# EAGLE board Qwiic Solid State Relay-Panel (EAGLE 9.6.0)
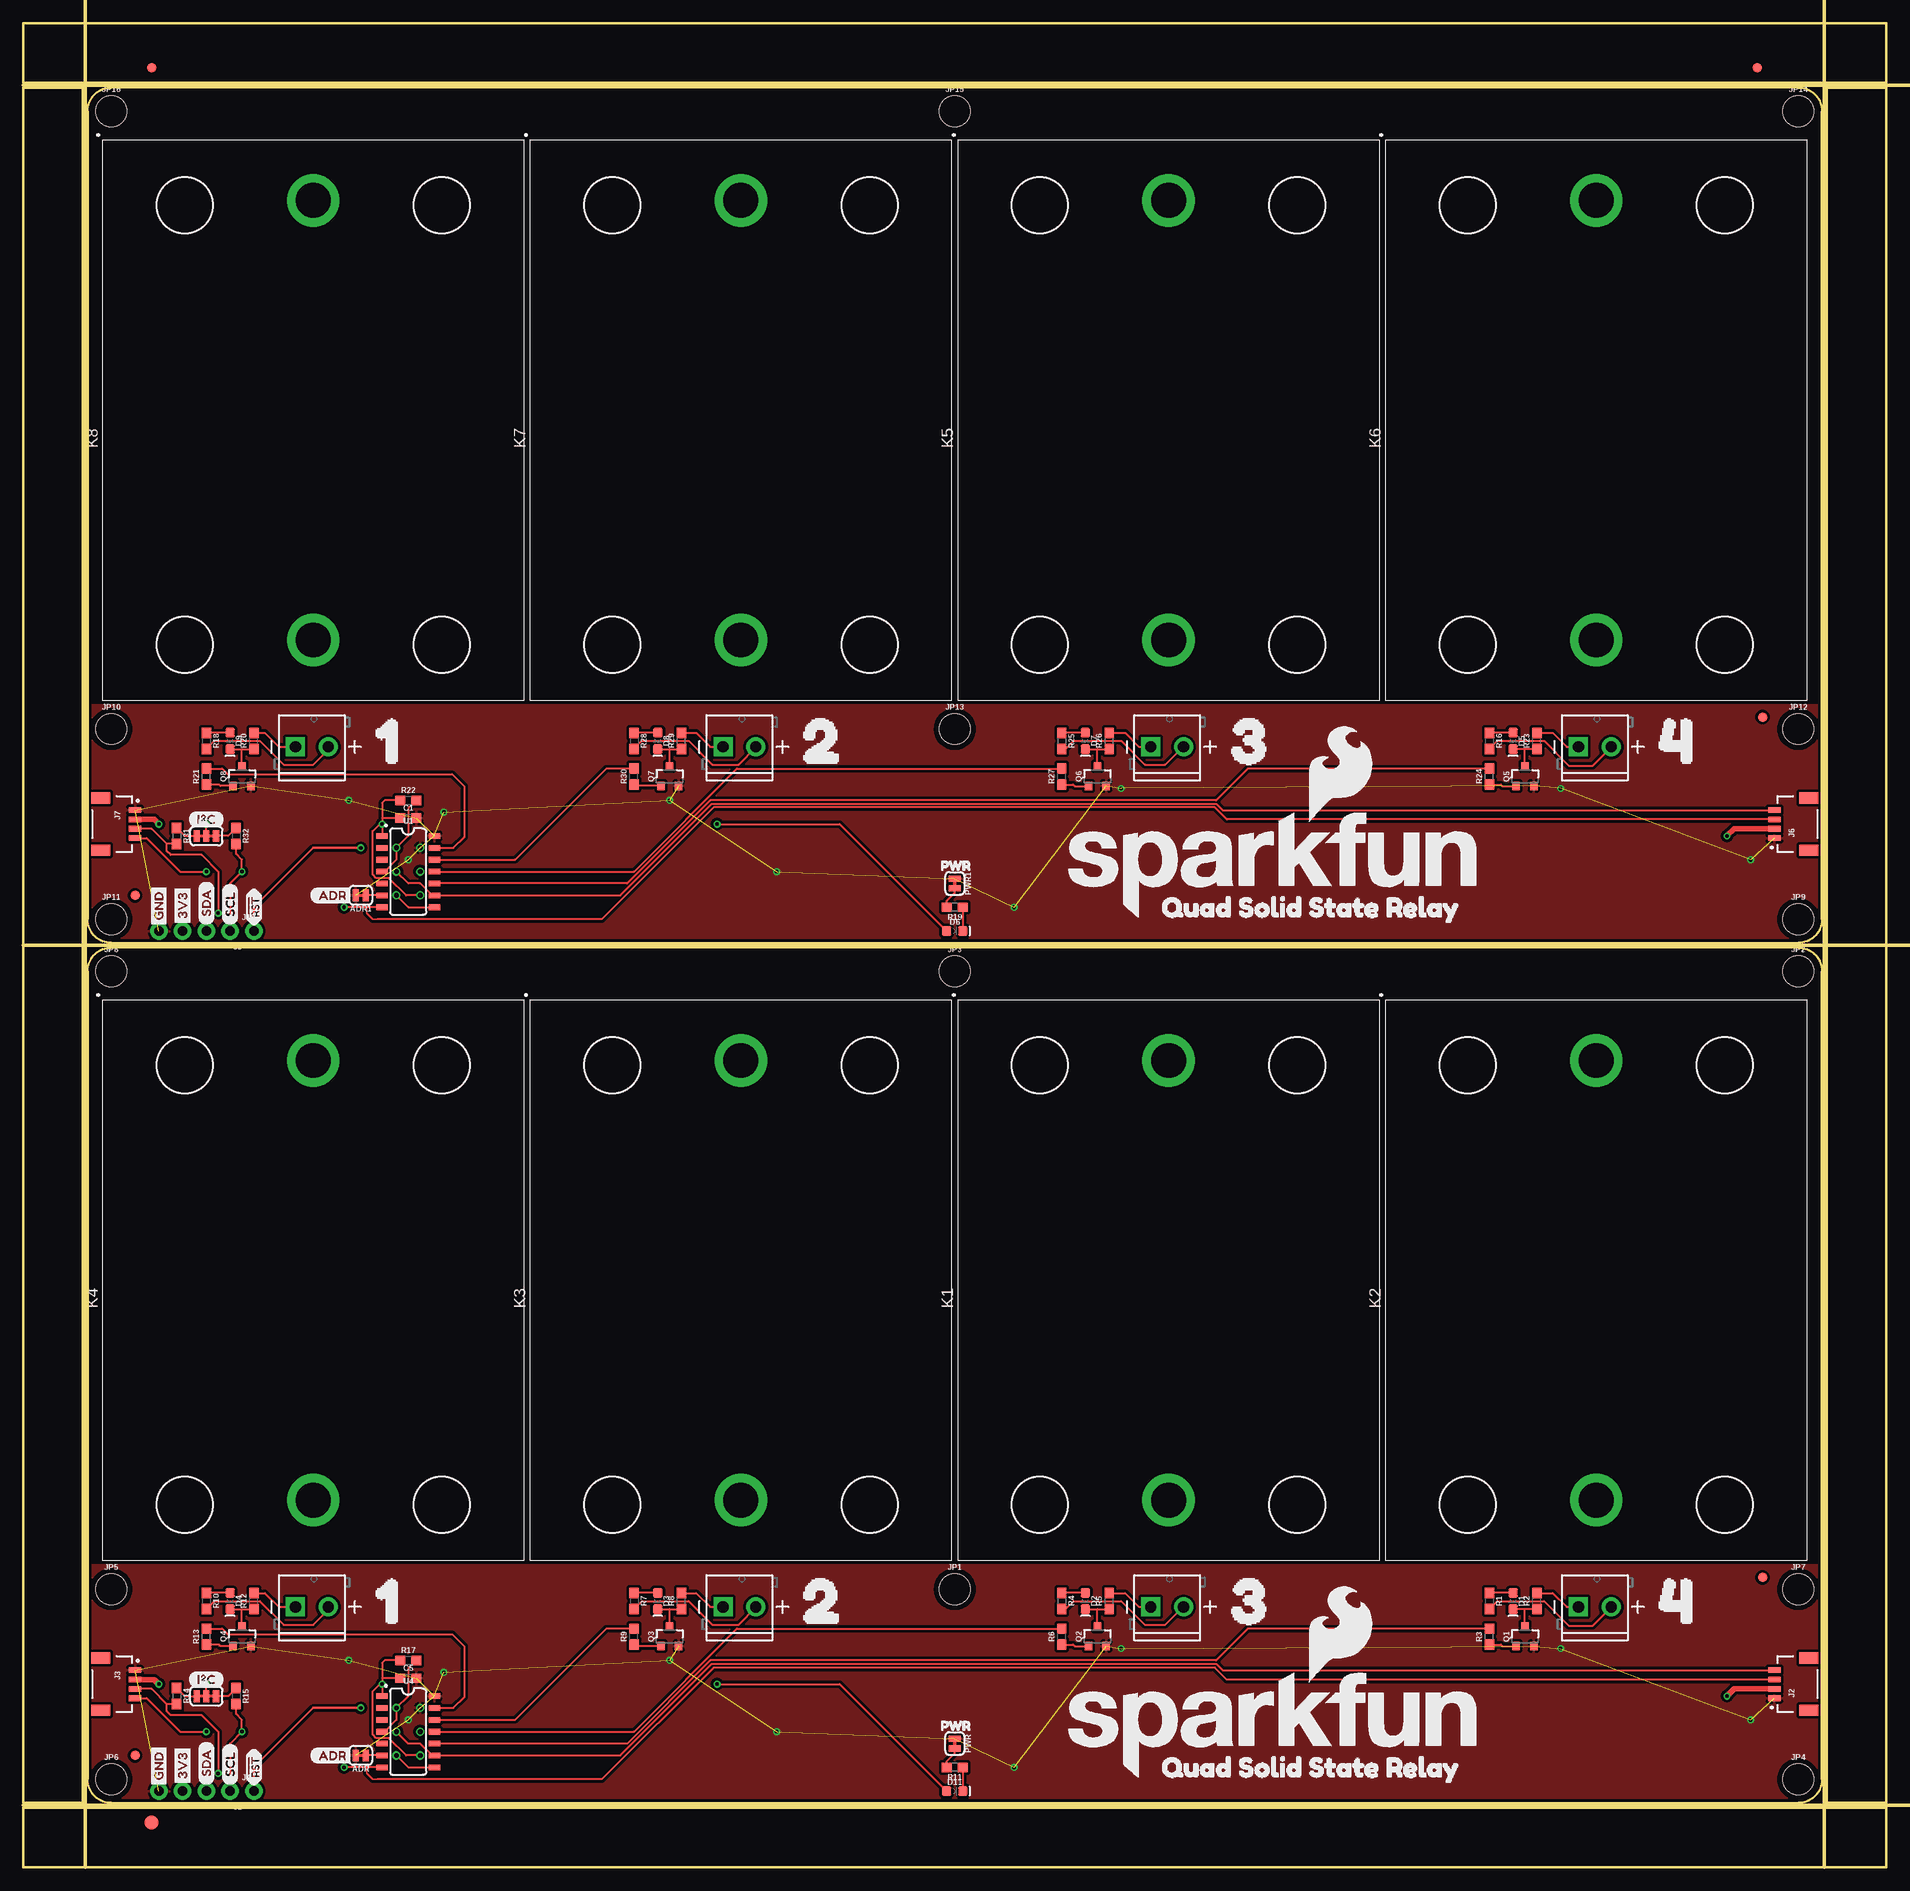
[diagram p0: board, top side]
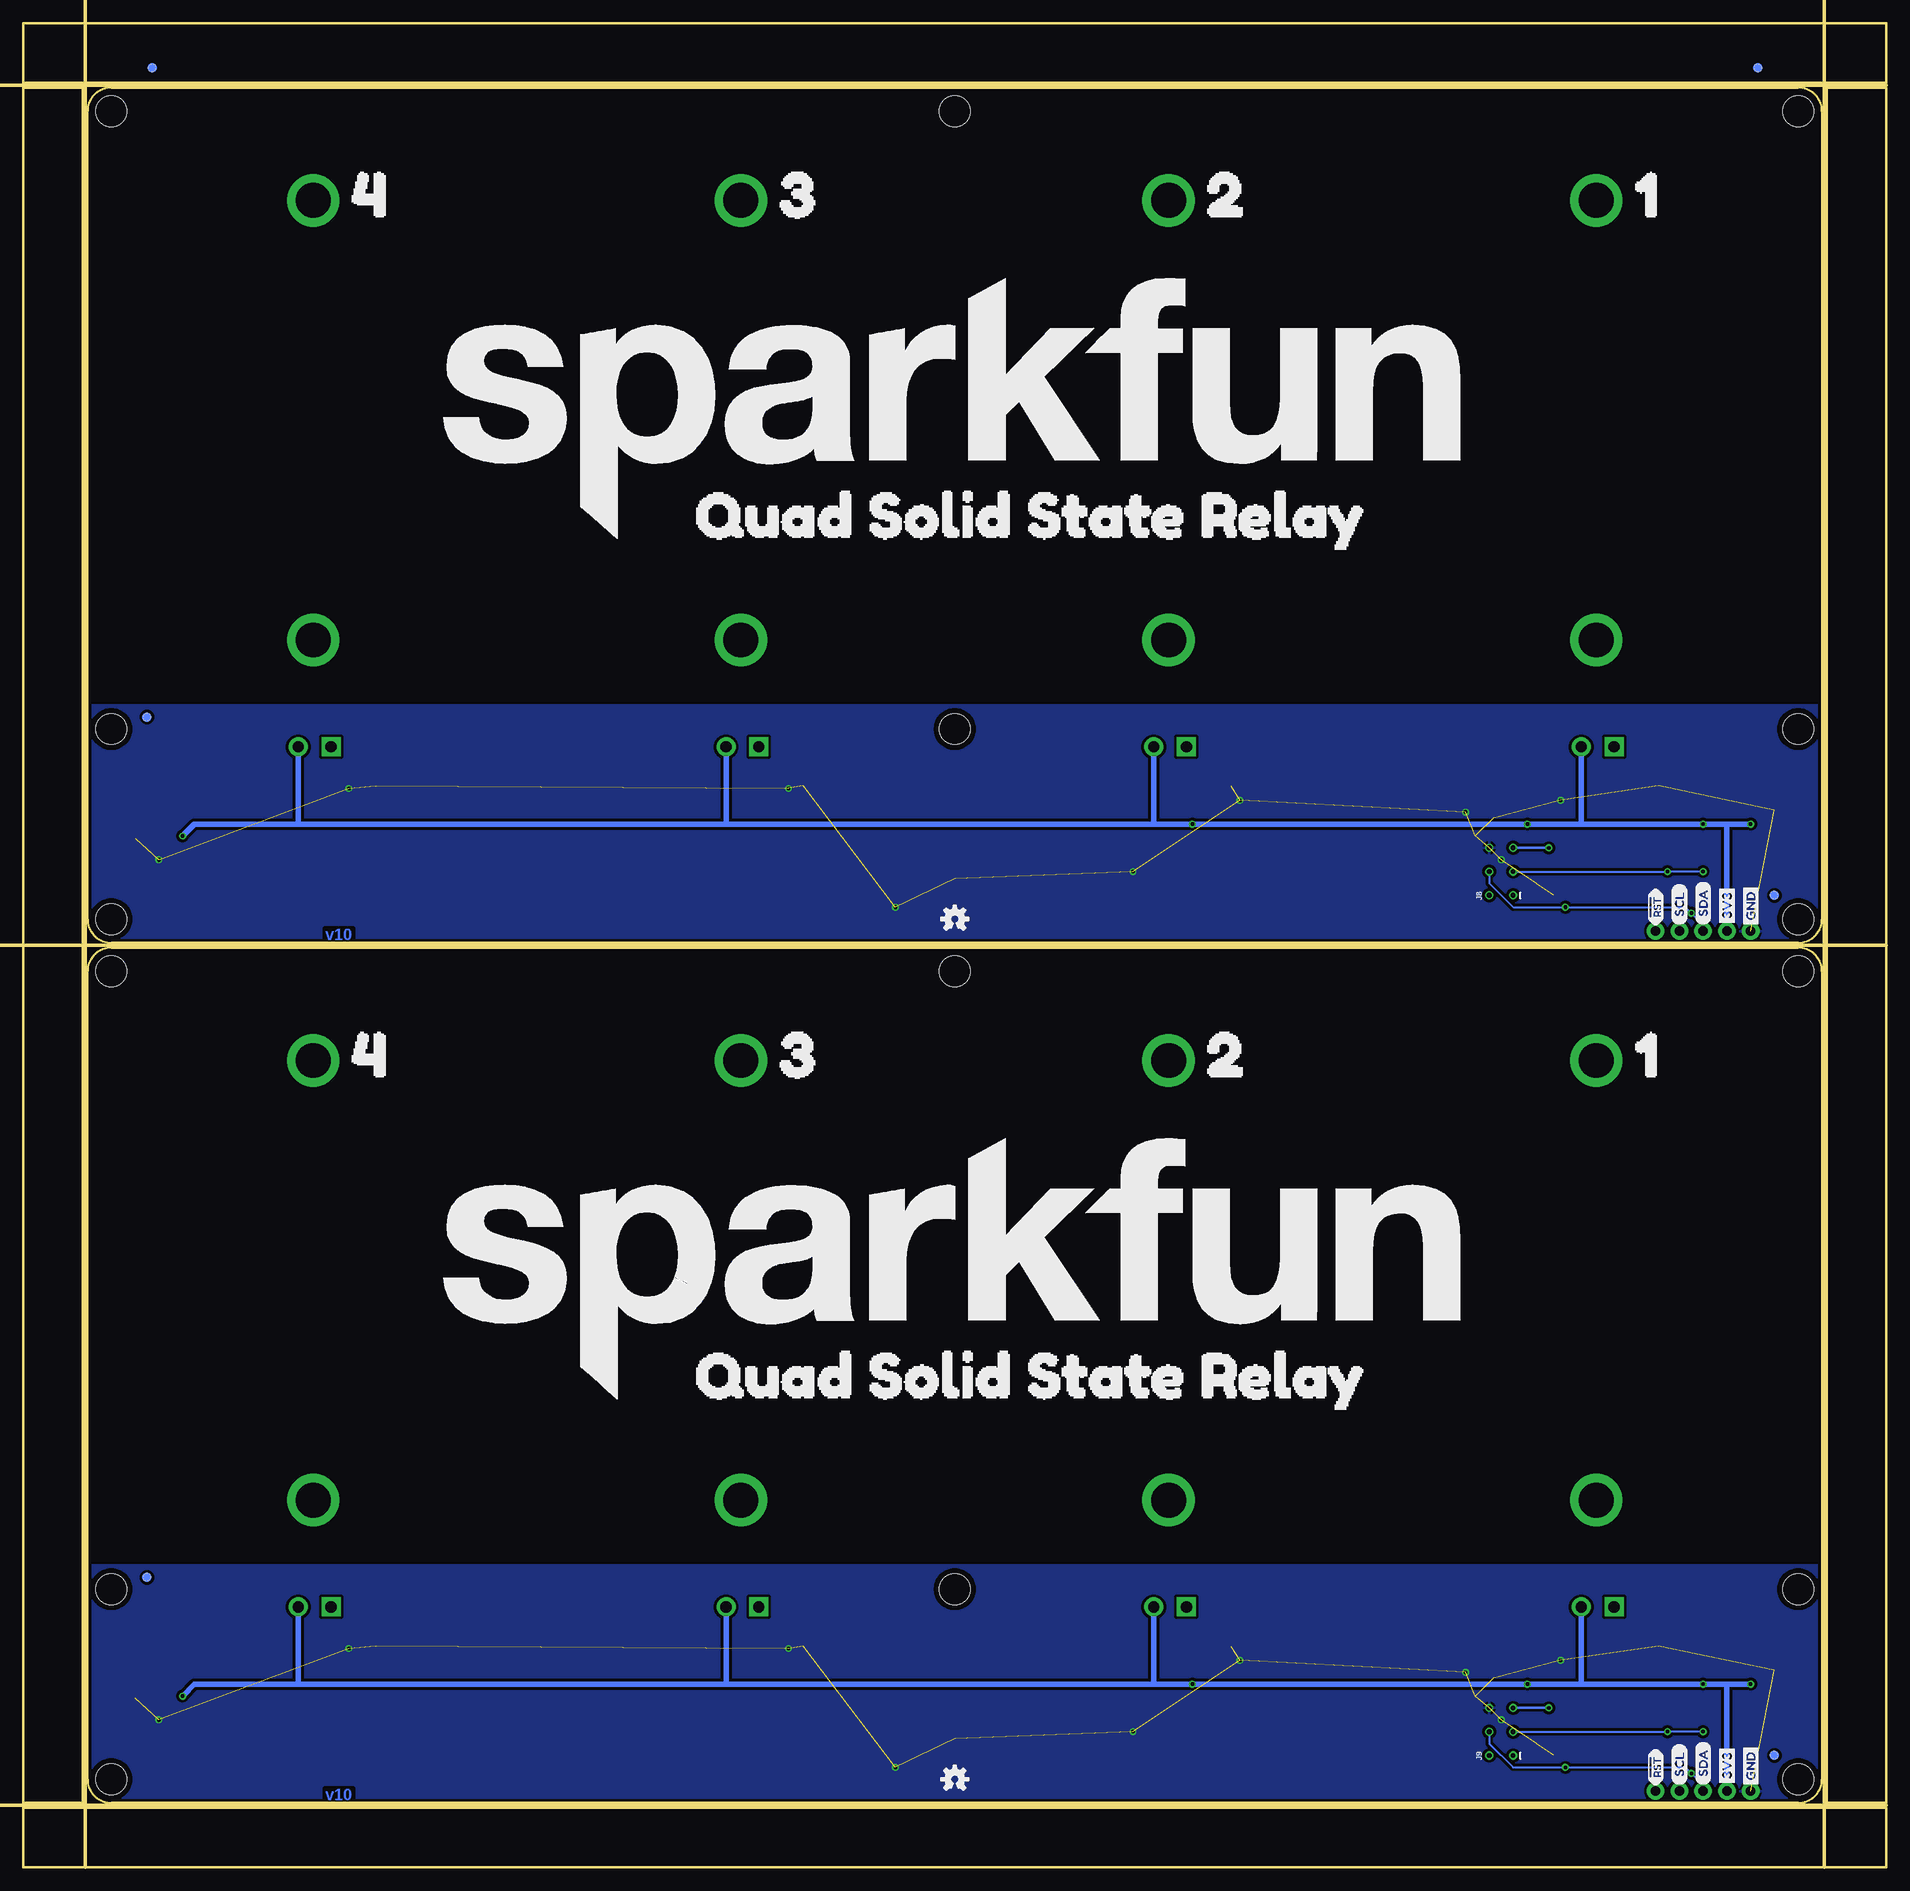
[diagram p1: board, bottom side, seen from below]

Size 199.14 x 197.1 mm. Coordinates in mm from the lower left corner, seen from the top.
Outline: 9.4,6.86 189.74,6.86 arc90 192.28,9.4 192.28,95.76 arc90 189.74,98.3 9.4,98.3 arc90 6.86,95.76 6.86,9.4 arc90 9.4,6.86
Outline: 9.4,98.81 189.74,98.81 arc90 192.28,101.35 192.28,187.71 arc90 189.74,190.25 9.4,190.25 arc90 6.86,187.71 6.86,101.35 arc90 9.4,98.81
Outline: 0,6.35 199.14,6.35 199.14,0 0,0 0,6.35
Outline: 192.79,190.25 199.14,190.25 199.14,6.86 192.79,6.86 192.79,190.25
Outline: 0,197.1 199.14,197.1 199.14,190.75 0,190.75 0,197.1
Outline: 0,190.25 6.35,190.25 6.35,6.86 0,6.86 0,190.25
Copper layers (1*16): Top 0.035mm / dielectric 1.5mm / Bottom 0.035mm
Design rules "Qwiic": minimum track width 7mil, minimum drill 15mil, track to track 7mil, track to pad 7mil, pad to pad 7mil, via to via 7mil, smd to smd 7mil, copper to edge 7mil, drill to drill 7mil, minimum pad ring 7mil, minimum via ring 7mil, stop-mask expansion 4mil, vias tented up to drill 25mil, thermal gap 10mil
Milling: 5 lines

## Footprints (pad centres in the part's own frame; a part is rotated, then mirrored left to right if it is on the bottom)
SMT-JUMPER_2_NC_TRACE_SILK = smd 0.66 x 1.27: 1 -0.521,0; 2 0.521,0
0603 = smd 1.1 x 1: 1 -0.85,0; 2 0.85,0
LED-0603 = smd 1 x 1: A -0.877,0; C 0.877,0
FIDUCIAL-1X2 = smd 1 x 1: 1 0,0
FIDUCIAL-1.5X3 = smd 1.5 x 1.5: 1 0,0
SMT-JUMPER_3_2-NC_TRACE_SILK = smd 0.66 x 1.27: 1 -1.041,0; 2 0,0; 3 1.041,0
1X04_NO_SILK = drill 1.016 pad 1.88: 1 0,0; 2 2.54,0; 3 5.08,0; 4 7.62,0
JST04_1MM_RA = smd 0.6 x 1.35: 1 -1.5,0; 2 -0.5,0; 3 0.5,0; 4 1.5,0 | smd 1.2 x 2: NC1 2.8,-3.675; NC2 -2.8,-3.675
1X01_NO_SILK = drill 1.016 pad 1.88: 1 0,0
2X3_TEST_POINTS = drill 0.508: 1 -2.54,-1.27; 2 -2.54,1.27; 3 0,-1.27; 4 0,1.27; 5 2.54,-1.27; 6 2.54,1.27
STAND-OFF = hole 3.302: 0,0
SSR-40DA-H = drill 1.2 pad 2.032 square: 1 -34.925,1.905 | drill 1.2 pad 2.032: 2 -34.925,-1.595 | drill 3.73 pad 5.6: H1 -23.5,0; H2 23.49,0
SOT23-3 = smd 0.8 x 0.9: 1 -0.95,-1; 2 0.95,-1; 3 0,1.1
SO14 = smd 0.6 x 1.2: 1 -3.81,-2.8; 2 -2.54,-2.8; 3 -1.27,-2.8; 4 0,-2.8; 5 1.27,-2.8; 6 2.54,-2.8; 7 3.81,-2.8; 8 3.81,2.8; 9 2.54,2.8; 10 1.27,2.8; 11 0,2.8; 12 -1.27,2.8; 13 -2.54,2.8; 14 -3.81,2.8

## Placement (x,y rotation side)
ADR  JUMPER-SMT_2_NC_TRACE_SILK  [SMT-JUMPER_2_NC_TRACE_SILK]  36.07,11.94 180 top
ADR1  JUMPER-SMT_2_NC_TRACE_SILK  [SMT-JUMPER_2_NC_TRACE_SILK]  36.07,103.89 180 top
C1  0.1uF  [0603]  41.15,112.14 0 top
C5  0.1uF  [0603]  41.15,20.19 0 top
D1  BLUE  [LED-0603]  159.26,28.45 270 top
D2  BLUE  [LED-0603]  113.54,28.45 270 top
D3  BLUE  [LED-0603]  67.82,28.45 270 top
D4  BLUE  [LED-0603]  22.1,28.45 270 top
D5  BLUE  [LED-0603]  159.26,120.4 270 top
D6  RED  [LED-0603]  99.57,100.08 0 top
D7  BLUE  [LED-0603]  113.54,120.4 270 top
D8  BLUE  [LED-0603]  67.82,120.4 270 top
D9  BLUE  [LED-0603]  22.1,120.4 270 top
D11  RED  [LED-0603]  99.57,8.13 0 top
E$1  [FIDUCIAL-1X2]  13.72,192.34 0 top
E$2  [FIDUCIAL-1X2]  13.72,192.34 0 bottom
E$3  [FIDUCIAL-1X2]  185.36,192.34 0 top
E$4  [FIDUCIAL-1X2]  185.36,192.34 0 bottom
E$5  [FIDUCIAL-1.5X3]  13.72,4.76 0 top
FD1  FIDUCIAL1X2  [FIDUCIAL-1X2]  185.93,30.99 0 top
FD2  FIDUCIAL1X2  [FIDUCIAL-1X2]  185.93,30.99 0 bottom
FD3  FIDUCIAL1X2  [FIDUCIAL-1X2]  11.94,11.94 0 bottom
FD4  FIDUCIAL1X2  [FIDUCIAL-1X2]  11.94,11.94 0 top
FD5  FIDUCIAL1X2  [FIDUCIAL-1X2]  185.93,122.94 0 top
FD6  FIDUCIAL1X2  [FIDUCIAL-1X2]  185.93,122.94 0 bottom
FD7  FIDUCIAL1X2  [FIDUCIAL-1X2]  11.94,103.89 0 bottom
FD8  FIDUCIAL1X2  [FIDUCIAL-1X2]  11.94,103.89 0 top
I2C  JUMPER-SMT_3_2-NC_TRACE_SILK  [SMT-JUMPER_3_2-NC_TRACE_SILK]  19.56,18.29 0 top
I2C1  JUMPER-SMT_3_2-NC_TRACE_SILK  [SMT-JUMPER_3_2-NC_TRACE_SILK]  19.56,110.24 0 top
J1  [1X04_NO_SILK]  22.1,8.13 180 top
J2  Qwiic Right Angle  [JST04_1MM_RA]  187.2,19.56 90 top
J3  Qwiic Right Angle  [JST04_1MM_RA]  11.94,19.56 270 top
J4  [1X01_NO_SILK]  24.64,8.13 0 top
J5  [1X04_NO_SILK]  22.1,100.08 180 top
J6  Qwiic Right Angle  [JST04_1MM_RA]  187.2,111.51 90 top
J7  Qwiic Right Angle  [JST04_1MM_RA]  11.94,111.51 270 top
J8  AVR_SPI_PROG_3X2TESTPOINTS  [2X3_TEST_POINTS]  41.15,106.43 90 bottom
J9  AVR_SPI_PROG_3X2TESTPOINTS  [2X3_TEST_POINTS]  41.15,14.48 90 bottom
J10  [1X01_NO_SILK]  24.64,100.08 0 top
JP1  STAND-OFF  [STAND-OFF]  99.57,29.72 0 top
JP2  STAND-OFF  [STAND-OFF]  189.74,95.76 0 top
JP3  STAND-OFF  [STAND-OFF]  99.57,95.76 0 top
JP4  STAND-OFF  [STAND-OFF]  189.74,9.4 0 top
JP5  STAND-OFF  [STAND-OFF]  9.4,29.72 0 top
JP6  STAND-OFF  [STAND-OFF]  9.4,9.4 0 top
JP7  STAND-OFF  [STAND-OFF]  189.74,29.72 0 top
JP8  STAND-OFF  [STAND-OFF]  9.4,95.76 0 top
JP9  STAND-OFF  [STAND-OFF]  189.74,101.35 0 top
JP10  STAND-OFF  [STAND-OFF]  9.4,121.67 0 top
JP11  STAND-OFF  [STAND-OFF]  9.4,101.35 0 top
JP12  STAND-OFF  [STAND-OFF]  189.74,121.67 0 top
JP13  STAND-OFF  [STAND-OFF]  99.57,121.67 0 top
JP14  STAND-OFF  [STAND-OFF]  189.74,187.71 0 top
JP15  STAND-OFF  [STAND-OFF]  99.57,187.71 0 top
JP16  STAND-OFF  [STAND-OFF]  9.4,187.71 0 top
K1  Solid State Relay - 40A  [SSR-40DA-H]  122.43,62.74 90 top
K2  Solid State Relay - 40A  [SSR-40DA-H]  168.15,62.74 90 top
K3  Solid State Relay - 40A  [SSR-40DA-H]  76.71,62.74 90 top
K4  Solid State Relay - 40A  [SSR-40DA-H]  30.99,62.74 90 top
K5  Solid State Relay - 40A  [SSR-40DA-H]  122.43,154.69 90 top
K6  Solid State Relay - 40A  [SSR-40DA-H]  168.15,154.69 90 top
K7  Solid State Relay - 40A  [SSR-40DA-H]  76.71,154.69 90 top
K8  Solid State Relay - 40A  [SSR-40DA-H]  30.99,154.69 90 top
LOGO1  SFE_LOGO_NAME1_INCH  [SFE_LOGO_NAME_1]  154.18,50.04 0 bottom
LOGO2  OSHW-LOGOS  [OSHW-LOGO-S]  99.57,9.4 0 bottom
LOGO3  OSHW-LOGOS  [OSHW-LOGO-S]  99.57,101.35 0 bottom
LOGO4  SFE_LOGO_NAME1_INCH  [SFE_LOGO_NAME_1]  154.18,141.99 0 bottom
PWR  JUMPER-SMT_2_NC_TRACE_SILK  [SMT-JUMPER_2_NC_TRACE_SILK]  99.57,13.21 270 top
PWR1  JUMPER-SMT_2_NC_TRACE_SILK  [SMT-JUMPER_2_NC_TRACE_SILK]  99.57,105.16 270 top
Q1  600mA/40V  [SOT23-3]  160.53,24.64 0 top
Q2  600mA/40V  [SOT23-3]  114.81,24.64 0 top
Q3  600mA/40V  [SOT23-3]  69.09,24.64 0 top
Q4  600mA/40V  [SOT23-3]  23.37,24.64 0 top
Q5  600mA/40V  [SOT23-3]  160.53,116.59 0 top
Q6  600mA/40V  [SOT23-3]  114.81,116.59 0 top
Q7  600mA/40V  [SOT23-3]  69.09,116.59 0 top
Q8  600mA/40V  [SOT23-3]  23.37,116.59 0 top
R1  1k  [0603]  156.72,28.45 270 top
R2  47  [0603]  161.8,28.45 90 top
R3  1k  [0603]  156.72,24.64 90 top
R4  1k  [0603]  111,28.45 270 top
R5  47  [0603]  116.08,28.45 90 top
R6  1k  [0603]  111,24.64 90 top
R7  1k  [0603]  65.28,28.45 270 top
R8  47  [0603]  70.36,28.45 90 top
R9  1k  [0603]  65.28,24.64 90 top
R10  1k  [0603]  19.56,28.45 270 top
R11  1k  [0603]  99.57,10.67 180 top
R12  47  [0603]  24.64,28.45 90 top
R13  1k  [0603]  19.56,24.64 90 top
R14  4.7k  [0603]  16.38,18.29 270 top
R15  4.7k  [0603]  22.73,18.29 270 top
R16  1k  [0603]  156.72,120.4 270 top
R17  4.7k  [0603]  41.15,22.1 0 top
R18  1k  [0603]  19.56,120.4 270 top
R19  1k  [0603]  99.57,102.62 180 top
R20  47  [0603]  24.64,120.4 90 top
R21  1k  [0603]  19.56,116.59 90 top
R22  4.7k  [0603]  41.15,114.05 0 top
R23  47  [0603]  161.8,120.4 90 top
R24  1k  [0603]  156.72,116.59 90 top
R25  1k  [0603]  111,120.4 270 top
R26  47  [0603]  116.08,120.4 90 top
R27  1k  [0603]  111,116.59 90 top
R28  1k  [0603]  65.28,120.4 270 top
R29  47  [0603]  70.36,120.4 90 top
R30  1k  [0603]  65.28,116.59 90 top
R31  4.7k  [0603]  16.38,110.24 270 top
R32  4.7k  [0603]  22.73,110.24 270 top
U1  ATTINY84-ARDUINO  [SO14]  41.15,106.43 270 top
U4  ATTINY84-ARDUINO  [SO14]  41.15,14.48 270 top
U$1  [SFE_LOGO_NAME_FLAME_.4]  111,9.4 0 top
U$2  [QUAD_SOLID_STATE_RELAY0]  131.32,52.58 0 bottom
U$3  [QUAD_SOLID_STATE_RELAY0]  119.89,10.67 0 top
U$4  [QUAD_SOLID_STATE_RELAY0]  119.89,10.67 0 top
U$5  [11]  33.53,28.45 0 top
U$6  [22]  79.25,28.45 0 top
U$7  [33]  124.97,28.45 0 top
U$8  [44]  170.69,28.45 0 top
U$9  [11]  30.99,86.87 0 bottom
U$10  [22]  76.71,86.87 0 bottom
U$11  [33]  122.43,86.87 0 bottom
U$12  [44]  168.15,86.87 0 bottom
U$13  [GND_P]  14.48,8.38 90 top
U$14  [GND_P]  14.48,8.38 90 bottom
U$15  [I2C]  17.65,20.07 0 top
U$16  [3V3_P]  17.02,8.51 90 top
U$17  [3V3_P]  17.02,8.51 90 bottom
U$18  [SCL_IO]  22.1,8.76 90 top
U$19  [SCL_IO]  22.1,8.76 90 bottom
U$20  [SDA_IO]  19.56,8.76 90 top
U$21  [SDA_IO]  19.56,8.76 90 bottom
U$22  [PWR_TO]  97.16,15.11 0 top
U$23  [ADR3]  30.61,11.94 0 top
U$24  [!RST_I]  24.64,8.51 90 top
U$25  [!RST_I]  24.64,8.51 90 bottom
U$26  [SFE_LOGO_NAME_FLAME_.4]  111,101.35 0 top
U$27  [QUAD_SOLID_STATE_RELAY0]  119.89,102.62 0 top
U$28  [QUAD_SOLID_STATE_RELAY0]  119.89,102.62 0 top
U$29  [QUAD_SOLID_STATE_RELAY0]  131.32,144.53 0 bottom
U$30  [11]  33.53,120.4 0 top
U$31  [22]  79.25,120.4 0 top
U$32  [33]  124.97,120.4 0 top
U$33  [44]  170.69,120.4 0 top
U$34  [11]  30.99,178.82 0 bottom
U$35  [22]  76.71,178.82 0 bottom
U$36  [33]  122.43,178.82 0 bottom
U$37  [44]  168.15,178.82 0 bottom
U$38  [GND_P]  14.48,100.33 90 top
U$39  [GND_P]  14.48,100.33 90 bottom
U$40  [I2C]  17.65,112.01 0 top
U$41  [3V3_P]  17.02,100.46 90 top
U$42  [3V3_P]  17.02,100.46 90 bottom
U$43  [SCL_IO]  22.1,100.71 90 top
U$44  [SCL_IO]  22.1,100.71 90 bottom
U$45  [SDA_IO]  19.56,100.71 90 top
U$46  [SDA_IO]  19.56,100.71 90 bottom
U$47  [PWR_TO]  97.16,107.06 0 top
U$48  [ADR3]  30.61,103.89 0 top
U$49  [!RST_I]  24.64,100.46 90 top
U$50  [!RST_I]  24.64,100.46 90 bottom

## Library data of the parts
ADR ADR1 I2C I2C1 PWR PWR1 = SparkFun-Jumpers
C1 C5 = SparkFun-Capacitors; PROD_ID: CAP-00810
D1-D5 D7-D9 = SparkFun-LED; PROD_ID: DIO-08575
D6 D11 = SparkFun-LED; PROD_ID: DIO-00819
E$1-E$4 FD1-FD8 LOGO1-LOGO4 U$1 U$26 = SparkFun-Aesthetics
E$5 = SparkFun-Retired
J1 J5 = SparkFun-Connectors; PROD_ID: CONN-09696
J2 J3 J6 J7 = SparkFun-Connectors; PROD_ID: CONN-13694
J4 J8-J10 = SparkFun-Connectors
JP1-JP16 = SparkFun-Hardware
K1-K8 = SparkFun-DiscreteSemi; PROD_ID: COMP-15116, CONN-08399, 2 x HW-15038
Q1-Q8 = SparkFun-DiscreteSemi; PROD_ID: TRANS-08049
R1 R3 R4 R6 R7 R9-R11 R13 R16 R18 R19 R21 R24 R25 R27 R28 R30 = SparkFun-Resistors; PROD_ID: RES-07856
R2 R5 R8 R12 R20 R23 R26 R29 = SparkFun-Resistors; PROD_ID: RES-14282
R14 R15 R17 R22 R31 R32 = SparkFun-Resistors; PROD_ID: RES-07857
U1 U4 = SparkFun-IC-Microcontroller; PROD_ID: IC-14155
U$2 U$5-U$12 U$29-U$37 = buzzard_labels (11)
U$3 U$4 U$27 U$28 = buzzard_labels (10)
U$13-U$22 U$24 U$25 U$38-U$47 U$49 U$50 = SparkFun-Buzzard
U$23 U$48 = buzzard_labels (13)

## Nets
3.3V: C5.1 D11.A I2C.2 J1.3 J2.2 J3.2 J9.2 K1.2 K2.2 K3.2 K4.2 R1.2 R4.2 R7.2 R10.2 R17.1 U4.1
3.3V1: C1.1 D6.A I2C1.2 J5.3 J6.2 J7.2 J8.2 K5.2 K6.2 K7.2 K8.2 R16.2 R18.2 R22.1 R25.2 R28.2 U1.1
!RESET: J4.1 J9.5 R17.2 U4.4
!RESET1: J8.5 J10.1 R22.2 U1.4
ADDR_JUMP: ADR.1 U4.6
ADDR_JUMP1: ADR1.1 U1.6
GND: ADR.2 C5.2 J1.4 J2.1 J3.1 J9.6 PWR.1 Q1.2 Q2.2 Q3.2 Q4.2 U4.14
GND1: ADR1.2 C1.2 J5.4 J6.1 J7.1 J8.6 PWR1.1 Q5.2 Q6.2 Q7.2 Q8.2 U1.14
MISO: J9.1 U4.8
MISO1: J8.1 U1.8
N$1: D2.C Q2.3 R5.1
N$2: D1.C Q1.3 R2.1
N$3: K1.1 R5.2
N$4: D2.A R4.1
N$5: D3.C Q3.3 R8.1
N$6: K3.1 R8.2
N$7: D1.A R1.1
N$8: D3.A R7.1
N$9: D4.C Q4.3 R12.1
N$10: K2.1 R2.2
N$11: K4.1 R12.2
N$12: D4.A R10.1
N$13: D11.C R11.1
N$14: PWR.2 R11.2
N$15: I2C.3 R15.1
N$16: I2C.1 R14.1
N$17: D6.C R19.1
N$18: PWR1.2 R19.2
N$19: D5.C Q5.3 R23.1
N$20: K6.1 R23.2
N$21: D5.A R16.1
N$22: D7.C Q6.3 R26.1
N$23: K5.1 R26.2
N$24: D7.A R25.1
N$25: D8.C Q7.3 R29.1
N$26: K7.1 R29.2
N$27: D8.A R28.1
N$28: D9.C Q8.3 R20.1
N$29: K8.1 R20.2
N$30: D9.A R18.1
N$31: I2C1.3 R32.1
N$32: I2C1.1 R31.1
OPTO_1: Q1.1 R3.1
OPTO_2: Q2.1 R6.1
OPTO_3: Q3.1 R9.1
OPTO_4: Q4.1 R13.1
OPTO_5: Q5.1 R24.1
OPTO_6: Q6.1 R27.1
OPTO_7: Q7.1 R30.1
OPTO_8: Q8.1 R21.1
RELAY_CTRL1: R3.2 U4.10
RELAY_CTRL2: R6.2 U4.11
RELAY_CTRL3: R9.2 U4.12
RELAY_CTRL4: R13.2 U4.13
RELAY_CTRL5: R24.2 U1.10
RELAY_CTRL6: R27.2 U1.11
RELAY_CTRL7: R30.2 U1.12
RELAY_CTRL8: R21.2 U1.13
SCL/SCK: J1.1 J2.4 J3.4 J9.3 R15.2 U4.9
SCL/SCK1: J5.1 J6.4 J7.4 J8.3 R32.2 U1.9
SDA/MOSI: J1.2 J2.3 J3.3 J9.4 R14.2 U4.7
SDA/MOSI1: J5.2 J6.3 J7.3 J8.4 R31.2 U1.7

## Tracks (layer width: path | path; a pad name or v marks a point on that pad's centre or on a via)
3.3V  (via drill 0.38)
  Top 0.203: R7.2 66.13,28.45 71.12,28.45 73.66,25.91 76.45,25.91 78.3,27.76 K3.2 | R4.2 111.42,27.6 112.27,28.45 117.35,28.45 119.89,25.91 122.05,25.91 124.02,27.88 K1.2 | R1.2 157.57,28.45 162.56,28.45 165.23,25.78 167.77,25.78 169.74,27.76 K2.2 | R10.2 20.41,28.45 25.27,28.45 27.81,25.91 30.99,25.91 32.58,27.5 K4.2 | R17.1 38.61,22.1 38.35,21.84 38.35,20.19 | 38.35,20.19 v38.35,19.56 | v38.35,19.56 U4.1 | C5.1 38.35,20.19 | J9.2 40.91,11.94 39.06,13.79 37.74,13.79 37.34,14.19 37.34,18.8 38.1,19.56 v38.35,19.56 | D11.A 87.26,19.56 v74.17,19.56 | I2C.2 v19.56,19.56
  Top 0.61: J3.2 13.98,20.06 v14.48,19.56 | v182.12,18.29 182.89,19.06 J2.2
  Bottom 0.61: v14.48,19.56 17.02,19.56 | 17.02,19.56 v19.56,19.56 32.64,19.56 | 32.64,19.56 v38.35,19.56 v74.17,19.56 78.49,19.56 | 78.49,19.56 124.02,19.56 | 124.02,19.56 169.67,19.56 | 169.67,19.56 180.85,19.56 v182.12,18.29 | K1.2 124.02,19.56 | K2.2 169.74,19.63 169.67,19.56 | K3.2 78.3,19.74 78.49,19.56 | 17.02,19.56 J1.3 | K4.2 32.58,19.61 32.64,19.56
3.3V1  (via drill 0.38)
  Top 0.203: R28.2 66.13,120.4 71.12,120.4 73.66,117.86 76.45,117.86 78.3,119.7 K7.2 | R25.2 111.42,119.55 112.27,120.4 117.35,120.4 119.89,117.86 122.05,117.86 124.02,119.83 K5.2 | R16.2 157.57,120.4 162.56,120.4 165.23,117.73 167.77,117.73 169.74,119.7 K6.2 | R18.2 20.41,120.4 25.27,120.4 27.81,117.86 30.99,117.86 32.58,119.45 K8.2 | R22.1 38.61,114.05 38.35,113.79 38.35,112.14 | 38.35,112.14 v38.35,111.51 | v38.35,111.51 U1.1 | C1.1 38.35,112.14 | J8.2 40.91,103.89 39.06,105.73 37.74,105.73 37.34,106.14 37.34,110.74 38.1,111.51 v38.35,111.51 | D6.A 87.26,111.51 v74.17,111.51 | I2C1.2 v19.56,111.51
  Top 0.61: J7.2 13.98,112.01 v14.48,111.51 | v182.12,110.24 182.89,111.01 J6.2
  Bottom 0.61: v14.48,111.51 17.02,111.51 | 17.02,111.51 v19.56,111.51 32.64,111.51 | 32.64,111.51 v38.35,111.51 v74.17,111.51 78.49,111.51 | 78.49,111.51 124.02,111.51 | 124.02,111.51 169.67,111.51 | 169.67,111.51 180.85,111.51 v182.12,110.24 | K5.2 124.02,111.51 | K6.2 169.74,111.58 169.67,111.51 | K7.2 78.3,111.69 78.49,111.51 | 17.02,111.51 J5.3 | K8.2 32.58,111.56 32.64,111.51
!RESET  (via drill 0.38)
  Top 0.203: R17.2 41.15,21.25 41.15,18.29 J9.5 39.88,15.75 38.61,14.48 U4.4
  Top 0.254: J4.1 24.64,10.67 30.99,17.02 v36.07,17.02
  Bottom 0.254: v36.07,17.02 J9.5
!RESET1  (via drill 0.38)
  Top 0.203: R22.2 41.15,113.2 41.15,110.24 J8.5 39.88,107.7 38.61,106.43 U1.4
  Top 0.254: J10.1 24.64,102.62 30.99,108.97 v36.07,108.97
  Bottom 0.254: v36.07,108.97 J8.5
ADDR_JUMP
  Top 0.203: U4.6 ADR.1
ADDR_JUMP1
  Top 0.203: U1.6 ADR1.1
GND  (via drill 0.38)  (20 unrouted)
  other vias: 34.8,22.1 44.96,20.83 41.15,15.75 69.09,22.1 117.35,23.37 105.92,10.67 80.52,14.48 164.34,23.37 184.66,15.75
  pour Top (isolate 0.305): 6.86,6.86 192.28,6.86 192.28,32.26 6.86,32.26
  pour Bottom (isolate 0.305): 192.28,6.86 6.86,6.86 6.86,32.26 192.28,32.26
GND1  (via drill 0.38)  (20 unrouted)
  other vias: 34.8,114.05 44.96,112.78 41.15,107.7 69.09,114.05 117.35,115.32 105.92,102.62 80.52,106.43 164.34,115.32 184.66,107.7
  pour Top (isolate 0.305): 6.86,98.81 192.28,98.81 192.28,124.21 6.86,124.21
  pour Bottom (isolate 0.305): 192.28,98.81 6.86,98.81 6.86,124.21 192.28,124.21
MISO
  Top 0.203: J9.1 41.15,10.67 U4.8
MISO1
  Top 0.203: J8.1 41.15,102.62 U1.8
N$1
  Top 0.203: D2.C 114.81,27.57 | 114.81,27.57 116.05,27.57 R5.1 | Q2.3 114.81,27.57
N$2
  Top 0.203: R2.1 161.77,27.57 160.53,27.57 | 160.53,27.57 D1.C | Q1.3 160.53,27.57
N$3
  Top 0.203: R5.2 117.77,29.3 119.25,27.81 K1.1
N$4
  Top 0.203: D2.A 111.03,29.32 R4.1
N$5
  Top 0.203: D3.C 69.09,27.57 | 69.09,27.57 70.33,27.57 R8.1 | Q3.3 69.09,27.57
N$6
  Top 0.203: R8.2 71.92,29.3 73.41,27.81 K3.1
N$7
  Top 0.203: D1.A 156.75,29.32 R1.1
N$8
  Top 0.203: D3.A 65.31,29.32 R7.1
N$9
  Top 0.203: D4.C 23.37,27.57 | 23.37,27.57 24.61,27.57 R12.1 | Q4.3 23.37,27.57
N$10
  Top 0.203: R2.2 163.49,29.3 164.97,27.81 K2.1
N$11
  Top 0.203: R12.2 25.82,29.3 27.3,27.81 K4.1
N$12
  Top 0.203: D4.A 19.59,29.32 R10.1
N$13
  Top 0.203: R11.1 100.45,10.64 D11.C
N$14
  Top 0.203: R11.2 98.72,11.34 99.57,12.19 PWR.2
N$15
  Top 0.203: R15.1 21.88,18.29 I2C.3
N$16
  Top 0.203: R14.1 17.23,18.29 I2C.1
N$17
  Top 0.203: R19.1 100.45,102.59 D6.C
N$18
  Top 0.203: R19.2 98.72,103.29 99.57,104.14 PWR1.2
N$19
  Top 0.203: R23.1 161.77,119.52 160.53,119.52 | 160.53,119.52 D5.C | Q5.3 160.53,119.52
N$20
  Top 0.203: R23.2 163.49,121.25 164.97,119.76 K6.1
N$21
  Top 0.203: D5.A 156.75,121.27 R16.1
N$22
  Top 0.203: D7.C 114.81,119.52 | 114.81,119.52 116.05,119.52 R26.1 | Q6.3 114.81,119.52
N$23
  Top 0.203: R26.2 117.77,121.25 119.25,119.76 K5.1
N$24
  Top 0.203: D7.A 111.03,121.27 R25.1
N$25
  Top 0.203: D8.C 69.09,119.52 | 69.09,119.52 70.33,119.52 R29.1 | Q7.3 69.09,119.52
N$26
  Top 0.203: R29.2 71.92,121.25 73.41,119.76 K7.1
N$27
  Top 0.203: D8.A 65.31,121.27 R28.1
N$28
  Top 0.203: D9.C 23.37,119.52 | 23.37,119.52 24.61,119.52 R20.1 | Q8.3 23.37,119.52
N$29
  Top 0.203: R20.2 25.82,121.25 27.3,119.76 K8.1
N$30
  Top 0.203: D9.A 19.59,121.27 R18.1
N$31
  Top 0.203: R32.1 21.88,110.24 I2C1.3
N$32
  Top 0.203: R31.1 17.23,110.24 I2C1.1
OPTO_1
  Top 0.203: R3.1 157.95,23.79 158.12,23.62 159.56,23.62 Q1.1
OPTO_2
  Top 0.203: R6.1 112.23,23.79 112.4,23.62 113.84,23.62 Q2.1
OPTO_3
  Top 0.203: Q3.1 65.43,23.64 R9.1
OPTO_4
  Top 0.203: Q4.1 21.07,23.64 20.92,23.79 R13.1
OPTO_5
  Top 0.203: R24.1 157.95,115.74 158.12,115.57 159.56,115.57 Q5.1
OPTO_6
  Top 0.203: R27.1 112.23,115.74 112.4,115.57 113.84,115.57 Q6.1
OPTO_7
  Top 0.203: Q7.1 65.43,115.59 R30.1
OPTO_8
  Top 0.203: Q8.1 21.07,115.59 20.92,115.74 R21.1
RELAY_CTRL1
  Top 0.203: R3.2 130.9,25.49 127.51,22.1 73.44,22.1 64.55,13.21 U4.10
RELAY_CTRL2
  Top 0.203: U4.11 65.28,14.48 76.29,25.49 R6.2
RELAY_CTRL3
  Top 0.203: R9.2 62.32,25.49 52.58,15.75 U4.12
RELAY_CTRL4
  Top 0.203: R13.2 21.25,25.49 21.84,24.89 45.85,24.89 47.12,23.62 47.12,18.16 45.98,17.02 U4.13
RELAY_CTRL5
  Top 0.203: R24.2 130.9,117.44 127.51,114.05 73.44,114.05 64.55,105.16 U1.10
RELAY_CTRL6
  Top 0.203: U1.11 65.28,106.43 76.29,117.44 R27.2
RELAY_CTRL7
  Top 0.203: R30.2 62.32,117.44 52.58,107.7 U1.12
RELAY_CTRL8
  Top 0.203: R21.2 21.25,117.44 21.84,116.84 45.85,116.84 47.12,115.56 47.12,110.11 45.98,108.97 U1.13
SCL/SCK  (via drill 0.38)
  Top 0.203: J9.3 41.15,13.21 42.42,13.21 43.69,11.94 U4.9 63.82,11.94 73.59,21.72 127.54,21.72 128.2,21.06 J2.4 | J1.1 22.1,13.21 v23.37,14.48 23.37,15.75 22.73,16.38 R15.2 | J3.4 13.18,18.06 16.76,14.48 v19.56,14.48
  Bottom 0.203: J9.3 v23.37,14.48 v19.56,14.48
SCL/SCK1  (via drill 0.38)
  Top 0.203: J8.3 41.15,105.16 42.42,105.16 43.69,103.89 U1.9 63.82,103.89 73.59,113.67 127.54,113.67 128.2,113.01 J6.4 | J5.1 22.1,105.16 v23.37,106.43 23.37,107.7 22.73,108.33 R32.2 | J7.4 13.18,110.01 16.76,106.43 v19.56,106.43
  Bottom 0.203: J8.3 v23.37,106.43 v19.56,106.43
SDA/MOSI  (via drill 0.38)
  Top 0.178: 37.85,9.4 37.34,9.4 36.7,10.03 36.7,10.67
  Top 0.203: U4.7 36.7,10.67 v34.29,10.67 | v20.83,10.03 20.83,14.48 19.05,16.26 15.75,16.26 15.33,16.68 15.33,17.44 | J2.3 128.66,20.06 127.38,21.34 73.79,21.34 61.85,9.4 37.85,9.4 | R14.2 15.33,17.44 | J3.3 13.71,19.06 15.33,17.44
  Bottom 0.203: J1.2 19.56,8.76 v20.83,10.03 21.46,10.67 v34.29,10.67 39.88,10.67 42.42,13.21 J9.4
SDA/MOSI1  (via drill 0.38)
  Top 0.178: 37.85,101.35 37.34,101.35 36.7,101.98 36.7,102.62
  Top 0.203: U1.7 36.7,102.62 v34.29,102.62 | v20.83,101.98 20.83,106.43 19.05,108.2 15.75,108.2 15.33,108.62 15.33,109.39 | J6.3 128.66,112.01 127.38,113.28 73.79,113.28 61.85,101.35 37.85,101.35 | R31.2 15.33,109.39 | J7.3 13.71,111.01 15.33,109.39
  Bottom 0.203: J5.2 19.56,100.71 v20.83,101.98 21.46,102.62 v34.29,102.62 39.88,102.62 42.42,105.16 J8.4

## Text on the board
Bottom: v10 | v10
Milling: v-score | v-score | v-score | v-score | v-score